# Altium PCB Main.PcbDoc
Units mil, origin at the board's own origin, x right, y up, seen from the top; angles counter-clockwise.
Board outline 850 x 950 mil, 2 copper layers (Top Layer, Bottom Layer); 23 components, 14 nets, 83 pads, 17 vias.
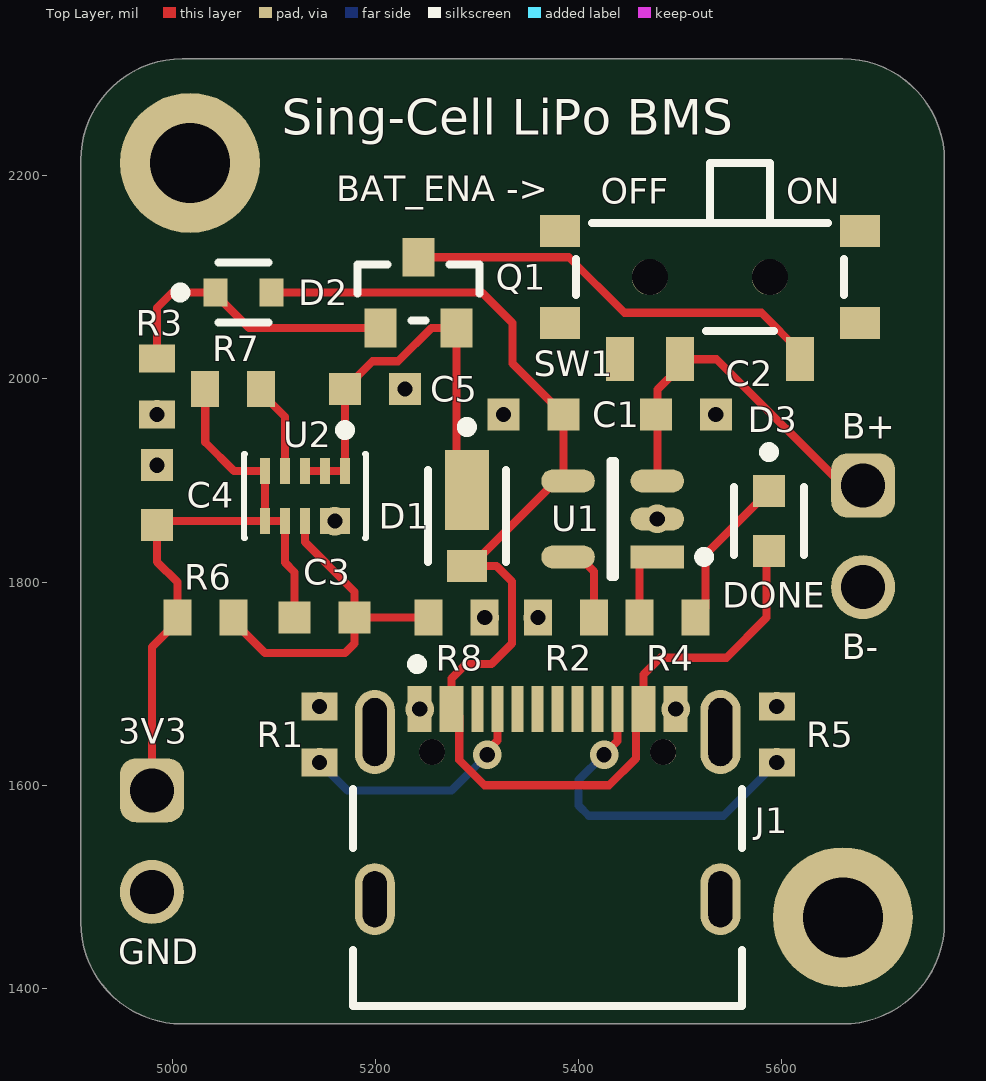
[diagram p0: Top Layer view]
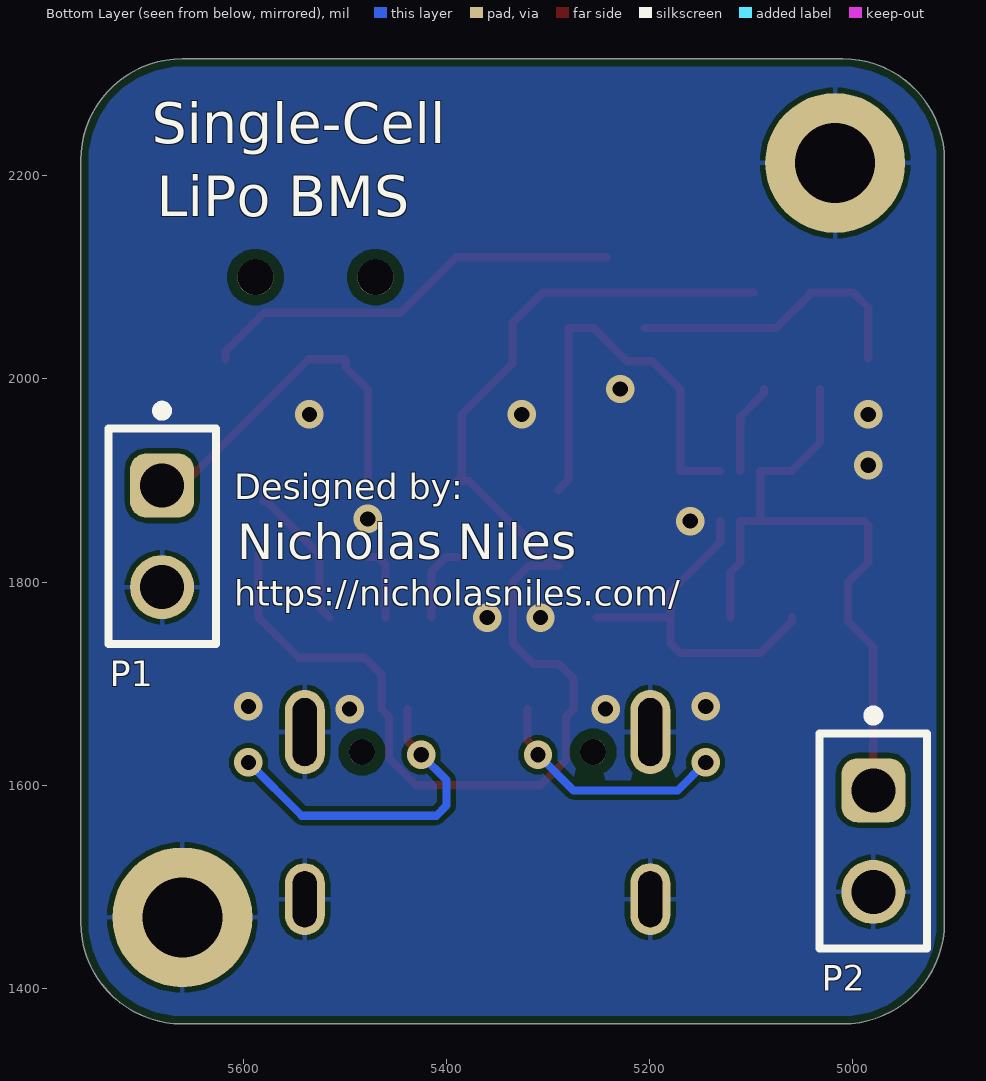
[diagram p1: Bottom Layer view, seen from below]
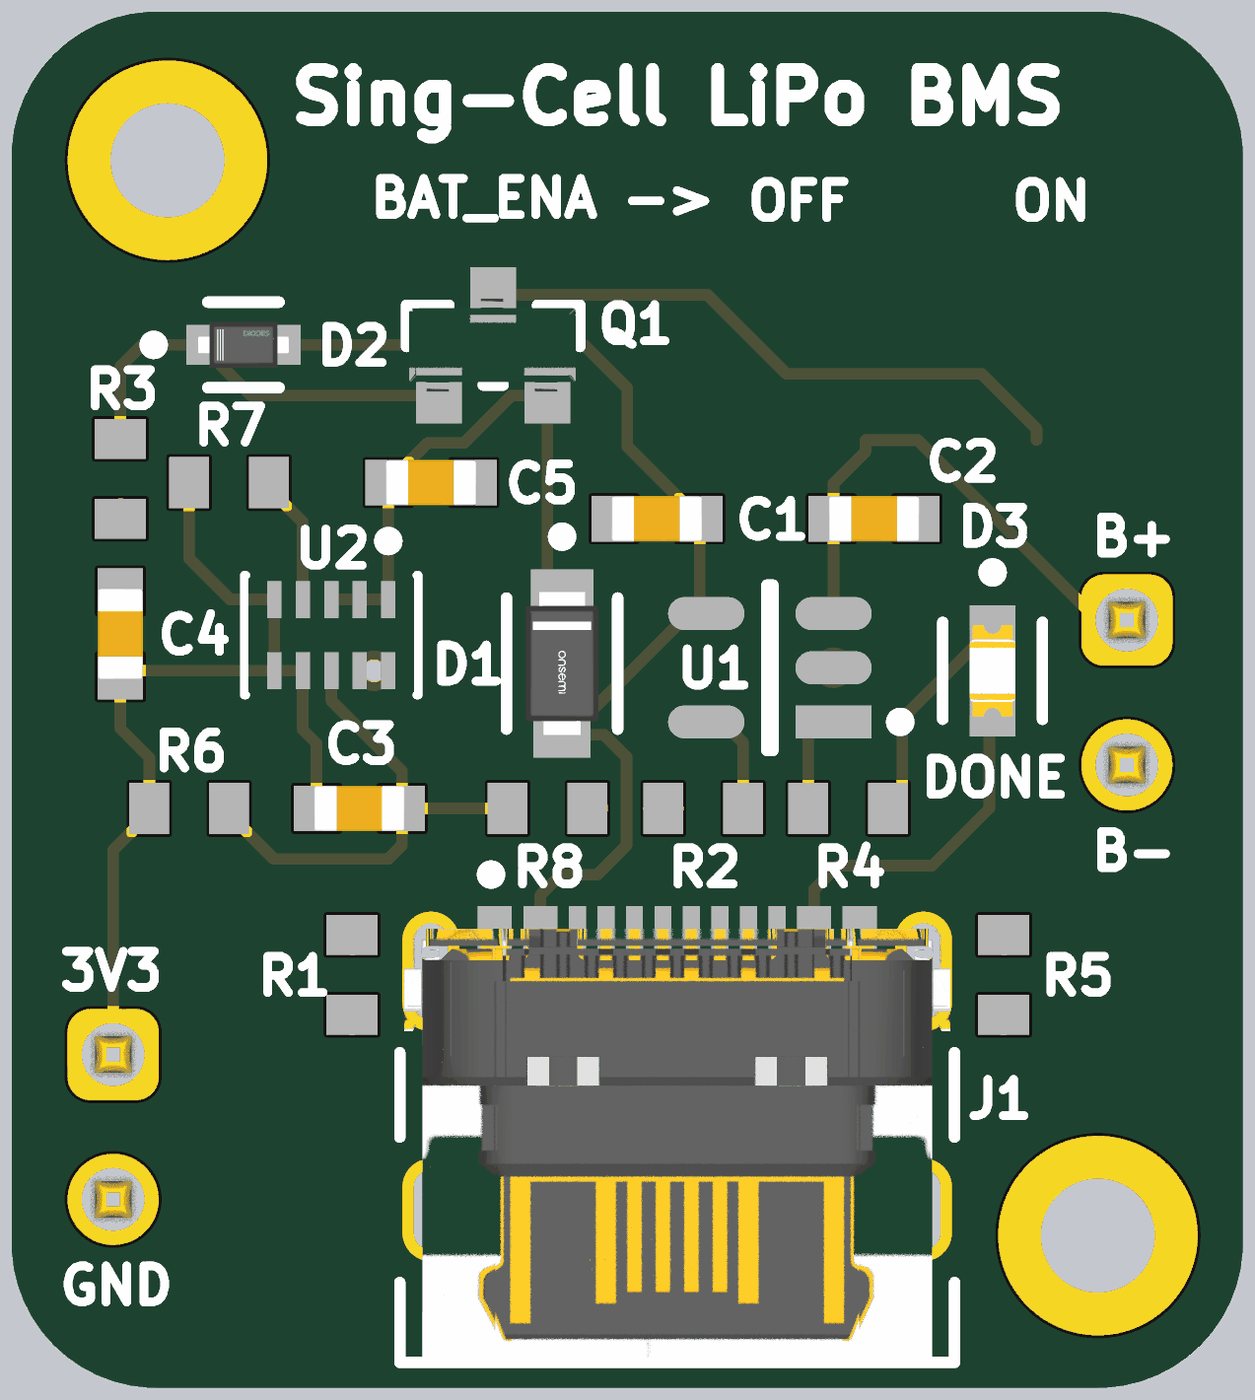
[diagram p2: 3D render of the assembled board from above, using the file's embedded part models]

## Layer stack, top to bottom
Top Solder: solder mask 0.4, Solder Resist, Dk 3.5
Top Layer: signal copper 1.4
Dielectric 1: dielectric 12.6, FR-4, Dk 4.8
Bottom Layer: signal copper 1.4
Bottom Solder: solder mask 0.4, Solder Resist, Dk 3.5

## Board outline
4910,1465 4910,2215 cw(c5010,2215) 5010,2315 5660,2315 cw(c5660,2215) 5760,2215 5760,1465 cw(c5660,1465) 5660,1365 5010,1365 cw(c5010,1465)

## Design rules (kind name [scope] priority, off if disabled: settings)
BoardOutlineClearance [All] p1: gap=7.87 ignorepadtopadclearanceinfootprint=FALSE
Clearance [All] p1: gap=5 ignorepadtopadclearanceinfootprint=TRUE except(10: Arc-Hole Track-Hole SMDPad-Hole THPad-Hole Via-Hole Fill-Hole Poly-Hole Region-Hole Text-Hole)
ComponentClearance [All] p1: gap=5 collisioncheckmode=3 verticalgap=5 showdistances=TRUE
DiffPairsRouting [All] p1: maxlimit=10 minlimit=5 mostfreqgap=5 toplayer_minwidth=5 toplayer_maxwidth=1000 toplayer_prefwidth=5 bottomlayer_minwidth=5 bottomlayer_maxwidth=1000 bottomlayer_prefwidth=5 maxuncoupledlength=500
Height [All] p1: minheight=0 maxheight=71497.94 prefheight=500
HoleSize [All] p1: absolutevalues=TRUE maxlimit=248.03 minlimit=11.81 maxpercent=80.000 minpercent=20.000
HoleToHoleClearance [All] p1: gap=10 allowstackedmicrovias=FALSE
MinimumAnnularRing [All] p1: minimumring=6
MinimumSolderMaskSliver [All] p1: minsoldermaskwidth=6
PlaneClearance [All] p1: clearance=5
PlaneConnect PlaneConnectPowerPads [InPadClass('PowerPads')] p1: planeconnectstyle=Direct reliefexpansion=20 reliefentries=4 reliefconductorwidth=10 reliefairgap=10
PlaneConnect [All] p2: pad.planeconnectstyle=Relief pad.reliefexpansion=11.81 pad.reliefentries=4 pad.reliefconductorwidth=5 pad.reliefairgap=5 via.planeconnectstyle=Direct via.reliefexpansion=11.81 via.reliefentries=4 via.reliefconductorwidth=5 via.reliefairgap=5
PolygonConnect PolygonConnectPowerPads [All vs (InPadClass('PowerPads'))] p1: connectstyle=Direct reliefconductorwidth=10 reliefentries=4 polygonreliefangle="90 Angle" airgapwidth=10
PolygonConnect [All] p2: thpad.connectstyle=Relief thpad.reliefconductorwidth=5 thpad.reliefentries=4 thpad.polygonreliefangle="90 Angle" thpad.airgapwidth=5 smdpad.connectstyle=Relief smdpad.reliefconductorwidth=5 smdpad.reliefentries=4 smdpad.polygonreliefangle="90 Angle" smdpad.airgapwidth=5 via.connectstyle=Direct via.reliefconductorwidth=5 via.reliefentries=4 via.polygonreliefangle="90 Angle" via.airgapwidth=5
RoutingVias [All] p1: holewidth=11.81 width=23.62 viastyle="Through Hole" minholewidth=11.81 minwidth=23.62 maxholewidth=23.62 maxwidth=259.84
SilkToSilkClearance [All] p1: silktosilkclearance=5
SilkToSolderMaskClearance [IsPad] p1: minsilkscreentomaskgap=5 clearancetoexposedcopper=TRUE
SolderMaskExpansion [All] p1: expansion=2 istentingtop=FALSE
SupplyNets "Schematic Supply Nets_5" [InNet('VBAT')] p1: voltage=0.000
SupplyNets "Schematic Supply Nets_4" [InNet('3V3')] p2: voltage=0.000
SupplyNets "Schematic Supply Nets_3" [InNet('USB_VCC')] p3: voltage=0.000
SupplyNets "Schematic Supply Nets_2" [InNet('GND')] p4: voltage=0.000
SupplyNets "Schematic Supply Nets_1" [InNet('BUCK_IN')] p5: voltage=0.000
UnRoutedNet [All] p1: checkbadconnections=TRUE
Width Width_10mil [All] p1: maxlimit=1000 minlimit=8 preferedwidth=8 minimp=50.000000 maximp=50.000000 favimp=50.000000
Width Width_6mil [All] p2: maxlimit=1000 minlimit=6 preferedwidth=6 minimp=50.000000 maximp=50.000000 favimp=50.000000
Width Power_20mil [All] p3: maxlimit=1000 minlimit=20 preferedwidth=20 minimp=50.000000 maximp=50.000000 favimp=50.000000
Width Power_12mil [All] p4: maxlimit=1000 minlimit=12 preferedwidth=12 minimp=50.000000 maximp=50.000000 favimp=50.000000
Width Width_5mil [All] p5: maxlimit=1000 minlimit=5 preferedwidth=5 minimp=50.000000 maximp=50.000000 favimp=50.000000
19 further rules are at their usual default settings.

## Components (designator, comment, footprint, x,y, rotation, side; value= is the part's Value field where it differs from the comment)
C1 "4.7µF" WCAP-CSGP_0603_L1.6W0.8H0.8_Reflow 5355.47,1965 r0 top
C2 "4.7µF" WCAP-CSGP_0603_L1.6W0.8H0.8_Reflow 5505.47,1965 r180 top
C3 "120pF" WCAP-CSGP_0603_L1.6W0.8H0.8_Reflow 5150,1765 r180 top
C4 "10µF" WCAP-CSGP_0603_L1.6W0.8H0.8_Reflow 4985,1885.47 r270 top
C5 "10µF" WCAP-CSGP_0603_L1.6W0.8H0.8_Reflow 5199.53,1990 r180 top
D1 "NRVBSS14HE" FP-477AD-MFG 5290,1865 r270 top
D2 "1N4148WT-7" FP-SOD523-MFG 5070,2085 r0 top
D3 "LTST-C190KGKT" FP-LTST-C190KGKT-MFG 5587.28,1860 r270 top
J1 "USB4105-GF-A" FP-USB4105-GF-A-MFG 5369.49,1533.66 r0 top
P1 "61300211121" 61300211121 5680,1845 r270 bottom
P2 "61300211121" 61300211121 4980,1545 r270 bottom
Q1 "IRLML6402TRPBF" FP-Micro3-MFG 5242.4,2084.84 r90 top
R1 "5.1kΩ" RESC1608X55X25NL10T15 5145,1650 r270 top
R2 "10kΩ" RESC1608X55X25NL10T15 5387.44,1765 r180 top
R3 "10kΩ" RESC1608X55X25NL10T15 4985,1992.56 r270 top
R4 "1kΩ" RESC1608X55X25NL10T15 5487.56,1765 r180 top
R5 "5.1kΩ" RESC1608X55X25NL10T15 5595,1650 r270 top
R6 "453kΩ" RESC1608X55X25NL10T15 5032.56,1765 r0 top
R7 "100kΩ" RESC1608X55X25NL10T15 5060,1990 r180 top
R8 "100kΩ" RESC1608X55X25NL10T15 5280,1765 r0 top
SW1 "450404015514" 450404015514 55529.06,52100 r0 top
U1 "MCP73831T-2ACI/OT" FP-C04-091-OT-IPC_B 5433.5,1862.09 r180 top
U2 "TPSM82823SILR" SIL0010D-MFG 5130.63,1884.61 r270 top

## Footprints (in the part's own frame and the unit in brackets; to place one, negate y for a bottom-side part, rotate by r counter-clockwise, add the part's x,y. Pads: shape width x height; smd on the part's side, far side on the other; paste and mask are expansions set on the pad)
61300211121 [mm] "Pin Header, pitch 2.54 mm, THT, Vertical, single row, 2p"
  rrect50% 1.6x1.6 hole 1.1: 1(-1.27,0)
  round 1.6 hole 1.1: 2(1.27,0)
  silkscreen extent -3.26,-1.35 2.69,1.35, body extent -2.54,-1.27 2.54,1.27, height 8.57
450404015514 [mm] "Right angle Slide Switch"
  rect 0.7x1.1 smd: COM(-1270.75,-1272.05) L1(-1267.75,-1272.05) L2(-1272.25,-1272.05)
  round 0.9 hole 0.9 unplated: M1(-1271.5,-1270) M2(-1268.5,-1270)
  rect 1x0.8 smd: M3(-1273.75,-1268.85) M4(-1266.25,-1268.85) M5(-1273.75,-1271.15) M6(-1266.25,-1271.15)
  silkscreen extent -1273.35,-1271.35 -1266.65,-1267.15, body extent -1273.85,-1272.25 -1266.15,-1267.12, height 1.4
FP-477AD-MFG [mm]
  rect 2x1.1 smd paste+0 mask+0: 1(-0.65,0)
  rect 0.8x1 smd paste+0 mask+0: 2(1.25,0)
  silkscreen extent -2.35,-0.97 1.15,0.97, body extent -1.75,-0.8 1.75,0.8, height 0.25
FP-C04-091-OT-IPC_B [mm]
  rect 1.338x0.578 smd paste+0 mask+0: 1(-1.116,0.95)
  rrect100% 1.338x0.578 smd paste+0 mask+0: 2(-1.116,0) 3(-1.116,-0.95) 4(1.116,-0.95) 5(1.116,0.95)
  silkscreen extent -2.41,-1.45 0.05,1.45
FP-LTST-C190KGKT-MFG [mm]
  rect 0.8x0.8 smd paste+0 mask+0: 1(-0.75,0) 2(0.75,0)
  silkscreen extent -1.85,-0.87 0.85,0.87, body extent -1.25,-0.55 1.25,0.55, height 0.25
FP-Micro3-MFG [mm]
  rect 0.972x0.802 smd paste+0 mask+0: 1(-0.885,0.95) 2(-0.885,-0.95) 3(0.885,0)
  silkscreen extent -0.7,-1.52 0.7,1.52, body extent -1.47,-1.87 1.47,1.87, height 0.25
FP-SOD523-MFG [mm]
  rect 0.6x0.7 smd paste+0 mask+0: 1(-0.7,0) 2(0.7,0)
  silkscreen extent -1.7,-0.75 0.63,0.75, body extent -1.1,-0.53 1.1,0.53, height 0.25
FP-USB4105-GF-A-MFG [mm]
  rrect100% 1x2.1 hole 1.7 slot 0.6 at 0 deg paste-2539.97 mask+0: 1(-4.32,3.015) 2(4.32,3.015)
  rrect100% 1x1.8 hole 1.4 slot 0.6 at 0 deg paste-2539.97 mask+0: 3(-4.32,-1.165) 4(4.32,-1.165)
  rect 0.6x1.15 smd paste+0 mask+0: A1-B12(-3.2,3.59) A4-B9(-2.4,3.59) B1-A12(3.2,3.59) B4-A9(2.4,3.59)
  rect 0.3x1.15 smd paste+0 mask+0: A5(-1.25,3.59) A6(-0.25,3.59) A7(0.25,3.59) A8(1.25,3.59) B5(1.75,3.59) B6(0.75,3.59) B7(-0.75,3.59) B8(-1.75,3.59)
  round 0.65 hole 0.65 unplated paste-2539.97 mask+0: ""(-2.89,2.515) ""(2.89,2.515)
  silkscreen extent -4.86,-3.84 4.86,4.84, body extent -4.96,-3.94 4.96,4.27, height 0.25
RESC1608X55X25NL10T15 [mm] "Chip Resistor, 2-Leads, Body 1.60x0.80mm, IPC Medium Density"
  rect 0.7x0.9 smd: 1(-0.7,0) 2(0.7,0)
  body extent -0.85,-0.45 0.85,0.45, height 0.55
SIL0010D-MFG [mm]
  rect 0.65x0.25 smd paste+0 mask+0: 1(-0.625,1) 2(-0.625,0.5) 3(-0.625,0) 4(-0.625,-0.5) 5(-0.625,-1) 6(0.625,-1) 7(0.625,-0.5) 8(0.625,0) 9(0.625,0.5) 10(0.625,1)
  silkscreen extent -1.77,-1.53 1.05,1.53
WCAP-CSGP_0603_L1.6W0.8H0.8_Reflow [mm] "Ceramic Capacitors, body 1.6x0.8mm"
  rect 0.8x0.8 smd: 1(-0.75,0) 2(0.75,0)
  body extent -0.8,-0.4 0.8,0.4, height 0.8

## Part data
C1 C2 C3 C5: library part CMP-207839-000060-3
C4: library part CMP-207839-000060-3, "10V tolerance"
D1: library part CMP-00278-93203856-2, "NRVBSS14HE Rectifier Diode, Schottky, 1 Phase, 1 Element, 1A, 40V V(RRM), Silicon", Capacitance=55pF, Forward Current=1A, Manufacturer Lifecycle Status=ACTIVE, Max Forward Surge Current (Ifsm)=25A, Max Junction Temperature (Tj)=150°C, Max Repetitive Reverse Voltage (Vrrm)=40V, Min Operating Temperature=-55°C, Peak Reverse Current=5µA, Height=750µm, Lifecycle Status=Production, Max Operating Temperature=150°C, NexarPartId=93203856, Reverse Voltage=40V, RoHS=Compliant
D2: library part CMP-2000-05518-3, "DIODE GEN PURP 80V 125MA SOD523", Average Rectified Current=125mA, Capacitance=2pF, Forward Current=250mA, Forward Voltage=1.25V, Max Forward Surge Current (Ifsm)=2A, Max Operating Temperature=150°C, Max Repetitive Reverse Voltage (Vrrm)=100V, Max Reverse Voltage (DC)=80V, Min Operating Temperature=-65°C, Package Quantity=3000, Peak Reverse Current=1uA, Power Dissipation=150mW, Contact Plating=Tin, Current Rating=125mA, Element Configuration=Single, Height=0.65mm, Lead Free="Lead Free", Length=0.9mm, Max Surge Current=2A, Mount="Surface Mount", Number of Pins=2, Output Current=125mA, Packaging="Tape and Reel", Peak Non-Repetitive Surge Current=2A, Polarity=Standard, Power Rating=150mW, Radiation Hardening=No, REACH SVHC="No SVHC", Recovery Time=4ns, Reverse Recovery Time=4ns, Voltage Rating (DC)=80V, Weight=3.5E-05oz, Width=1.3mm
D3: library part CMP-2000-05197-2, "LED GREEN CLEAR CHIP SMD", Case Code (Imperial)=0603, Case Code (Metric)=1608, Color=Green, Forward Current=30mA, Forward Voltage=2V, Lens Color=Colorless, Max Operating Temperature=85°C, Min Operating Temperature=-55°C, Package Quantity=1, Power Dissipation=75mW, Reverse Voltage=5V, Test Current=20mA, Case/Package=0603, Depth=0.8mm, Dominant Wavelength=571nm, Height=0.8mm, Illumination Color=Green, Lead Free="Lead Free", Length=1.6mm, Lens Style=Diffused, Lens Transparency=Clear, Luminous Intensity=35mcd, Mount="Surface Mount", Number of Elements=1, Number of LEDs=1, Number of Pins=2, Packaging="Tape and Reel", Power Rating=75mW, Radiation Hardening=No, Viewing Angle=130°, Wavelength=574nm, Width=0.8mm
J1: library part CMP-245163-000001-1, "CONN RCPT USB2.0 TYPEC 5A", Current Rating=5/6.25/1.25/0.25A, Manufacturer=GCT, Package=0, Temperature="-40°C to +85°C", Temperature Range High=+85°C, Temperature Range Low=-40°C, Voltage Rating=20V, Automotive=No, Category=Conn, ComponentLink2Description=Datasheet, ComponentLink2URL=https://gct.co/files/drawings/usb4105.pdf, Conn Orientation="Right Angle", Contact Material=Gold,Nickel, Device Class L1=Connectors, Device Class L2="USB Connectors", Device Class L3=unset, Digikey Description="CONN RCPT USB2.0 TYPEC 5A", Height=3.46mm, Is Female=yes, Lead Free=Yes, Manufacturer Part Number=USB4105-GF-A, Number of Contacts=16, Octopart=https://octopart.com/usb4105-gf-a-gct-106627878, RoHS=TRUE, Usb Standard="USB 2.0"
P1 P2: library part CMP-1712-00002-6, Color=Black, Contact Resistance=20mΩ, Current Rating=3A, Max Operating Temperature=125°C, Min Operating Temperature=-40°C, Operating Supply Voltage=250V, Connector Type="Male Pin", Contact Gender=Male, Contact Material=Copper, Contact Mating Length=5.9944mm, Contact Plating=Gold, Gender=Male, Height=8.94mm, Housing Material=PBT, Lead Free="Lead Free", Lead Pitch=2.54mm, Mount="Through Hole", NexarPartId=20081794, Number of Contacts=2, Number of Pins=2, Number of Positions=2, Number of Rows=1, Orientation=Vertical, Packaging=Bulk, Pitch=2.54mm, REACH SVHC="No SVHC", RoHS=Compliant, Termination="Through Hole", Voltage Rating=250V
Q1: library part CMP-32901-000130-1, "MOSFET P-CH 20V 3.7A SOT-23", Continuous Drain Current=-3.7A, Drain To Source Breakdown Voltage=-20V, Drain To Source Resistance=0.05Ω, Gate To Source Voltage=12V, Input Capacitace At Vds="633pF @ -10V", Manufacturer=Infineon, Max Forward Diode Voltage=-1.2V, Max Junction Temp=+150°C, Package=Micro3, Power Dissipation=1.3W, Pulse Drain Current=-22A, Temperature="-55°C to +150°C", Temperature Range Low=-55°C, Automotive=No, Category=Trans, ComponentLink2Description=Datasheet, ComponentLink2URL=https://www.infineon.com/dgdl/irlml6402pbf.pdf?fileId=5546d462533600a401535668d5c2263c, Depletion Mode=False, Device Class L1="Discrete Semiconductors", Device Class L2=Transistors, Device Class L3=MOSFETs, Digikey Description="MOSFET P-CH 20V 3.7A SOT-23", Drain To Source Voltage=-20V, Footprint Url=http://irf.com/package/outline/po_micro3.pdf, Gate Charge At Vgs="8nC @ -5V", Height=1.12mm, Ipc Land Pattern Name=SOT95P237X100-3, Lead Free=Yes, Manufacturer Part Number=IRLML6402TRPBF, Number Of Channels=1, Number Of P Channels=1, Octopart=https://octopart.com/irlml6402trpbf-infineon-65874989, Reverse Recovery Charge=11nC, Reverse Recovery Time=29ns, RoHS=TRUE, Rthja Max=75°C/W, Standoff Height=0.01mm, Technology=MOSFET, Temperature Range High=+150°C, Threshold Vgs=-0.55V, Threshold Vgs Max=-1.2V, Threshold Vgs Min=-0.4V, Turn Off Delay Time=588ns, Turn On Delay Time=350ns
R1 R2 R3 R4 R5 R6 R7 R8: library part CMP-2000-04186-1
SW1: library part CMP-03913-99472344-1, "450404015514 Slide Switch, 0.3A, 5Vdc, Smd Rohs Compliant: Yes", Current Rating=300mA, Insulation Resistance=100MΩ, Max Operating Temperature=85°C, Min Operating Temperature=-40°C, Voltage Rating=5V, Contact Plating=Silver, NexarPartId=99472344, Packaging="Tape and Reel", RoHS=Compliant
U1: library part CMP-0133-00143-2, "IC CONTROLLR LI-ION 4.2V SOT23-5", Case/Package=SOT-23, Drain To Source Resistance=350mR, Max Charge Current=500mA, Max Input Voltage=6V, Max Operating Temperature=85°C, Max Output Voltage=4.5V, Max Power Dissipation=1.54W, Min Operating Temperature=-40°C, Min Output Voltage=4.168V, Min Supply Voltage=3.75V, Output Voltage=4.2V, Voltage Rating=4.534V, Contact Plating=Tin, Height=0.051inch, Lead Free="Lead Free", Length=0.122inch, Max Supply Voltage=6V, Mount="Surface Mount", Number of Cells=1, Number Of Channels=1, Number of Outputs=1, Number of Pins=5, Output Current=500mA, Packaging="Tape and Reel", Radiation Hardening=No, REACH SVHC="No SVHC", Termination=SMD/SMT, Weight=0.00709oz, Width=0.071inch
U2: "No Description Available", Mfr_Name="Texas Instruments", RefDes=RefDes, Type=TYPE

## Free pads (board coordinates)
  round 137.79 hole 78.74: 7(5017.5,2212.5) 7(5660,1470)

## Via types
v1: diameter 28, hole 15, Top Layer to Bottom Layer, tented both sides, 17 vias

## Nets (pads, with @x,y where several pads share a name; then routed paths per layer and width w, separated by ;. In a path a pad name is that pad's centre, name@x,y a point inside that pad or via, vN(x,y) a via of type N, cw(c..) or ccw(c..) an arc to the next point about the centre after c; other vN are vias at no path point)
3V3: C3.2 C4.2 P2.1 R6.1 R7.2 U2.5 U2.6 U2.7 | length 678.4
  Top Layer w8: P2.1 4980,1736.06 5005,1761.06 5005,1799.91 4985,1819.91 C4.2 4989.06,1860 U2.6 ; R7.2 5032.44,1937.56 5060.79,1909.21 U2.5 U2.6 ; C3.2 5120.47,1809.67 5110.94,1819.2 U2.7 U2.6
BUCK_IN: C5.2 D1.1 Q1.2 U2.1 U2.2 U2.3 | length 418.4
  Top Layer w8: U2.3 U2.2 U2.1 C5.2 5197.28,2017.28 5222.28,2017.28 5255,2050 Q1.2 5279.8,1900.79 D1.1
GND: C1.1 C2.1 C4.1 C5.1 J1.1 J1.2 J1.3 J1.4 J1.A1-B12 J1.B1-A12 P1.2 P2.2 pad.7 R1.1 R2.2 R3.2 R5.1 R8.2 U1.2 U2.9 U2.10 | length 19.7
  Top Layer w8: U2.9 U2.10
  other v1: 5243.5,1675 5495.47,1675 5145,1677.56 5595,1677.56 5307.56,1765 5359.88,1765 5160.16,1860 5477.45,1862.09 4985,1915 4985,1965 5325.94,1965 5535,1965 5229.06,1990
NetC3_1: C3.1 R6.2 R8.1 U2.8 | length 353.8
  Top Layer w8: R6.2 5060.12,1761.06 5091.18,1730 5170,1730 5179.53,1739.53 C3.1 ; U2.8 5130.63,1839.37 5179.53,1790.47 C3.1 ; R8.1 C3.1
NetD2_1: D2.1 Q1.1 R3.1 | length 289.8
  Top Layer w8: R3.1 4985,2070 5000,2085 D2.1 ; D2.1@5042.44,2083.03 5075.47,2050 Q1.1
NetD3_1: D3.1 R4.1 | length 143.8
  Top Layer w8: R4.1 5524.9,1774.78 5524.9,1827.14 5575.54,1877.78 5577.76,1880 D3.1@5580.66,1880
NetJ1_A5: J1.A5 R1.2 | length 240.1
  Top Layer w8: v1(5310,1630) 5310,1633.65 5320.28,1643.92 J1.A5
  Bottom Layer w8: v1(5145,1622.44) 5172.44,1595 5275,1595 v1(5310,1630)
NetJ1_B5: J1.B5 R5.2 | length 334.1
  Top Layer w8: v1(5425,1630) 5438.39,1643.39 J1.B5 ; R5.2@5593.36,1624.08 v1(5595,1622.44)
  Bottom Layer w8: v1(5425,1630) 5400,1605 5400,1580 5410,1570 5542.56,1570 v1(5595,1622.44)
NetQ1_3: Q1.3 SW1.L1 | length 421.4
  Top Layer w8: Q1.3 5390.31,2119.68 5445,2065 5579.8,2065 5617.64,2027.17 SW1.L1
NetR7_1: R7.1 U2.4 | length 90.5
  Top Layer w8: R7.1 5087.56,1986.06 5110.94,1962.68 U2.4
PROG: R2.1 U1.5 | length 76.7
  Top Layer w8: U1.5 5400.53,1824.68 5415,1810.22 R2.1
STAT: R4.2 U1.1 | length 72.8
  Top Layer w8: R4.2 5460,1817.31 5467.38,1824.68 U1.1
USB_VCC: C1.2 D1.2 D2.2 D3.2 J1.A4-B9 J1.B4-A9 U1.4 | length 1308
  Top Layer w8: D2.2 5305,2085 5335,2055 5335,2015 C1.2 5385,1904.05 U1.4 5377.64,1899.49 D1.2@5293.94,1815.79 ; D1.2 D1.2@5293.94,1815.79 ; J1.B4-A9@5459.95,1670.98 5456.47,1667.5 5456.47,1626.47 5430,1600 5307.47,1600 5282.5,1624.97 5282.5,1667.5 J1.A4-B9 5275,1705 5289.25,1719.25 5314.25,1719.25 5334.53,1739.53 5334.53,1800.47 5319.21,1815.79 D1.2@5293.94,1815.79 ; J1.B4-A9 5463.98,1708.98 5480.44,1725.44 5545.44,1725.44 5585,1765 D3.2@5585,1826.54
VBAT: C2.2 P1.1 SW1.COM U1.3 | length 355
  Top Layer w8: U1.3 5477.45,1989.34 5499.53,2011.42 SW1.COM 5535.71,2019.29 P1.1@5670,1885
pads on no net: J1. J1.A6 J1.A7 J1.A8 J1.B6 J1.B7 J1.B8 SW1.L2 SW1.M1 SW1.M2 SW1.M3 SW1.M4 SW1.M5 SW1.M6

## Polygon pours and split planes (outlines as drawn)
GND on Bottom Layer "GND_L02_P000" (solid, pour order 0): 5760,2315 4910,2315 4910,1365 5760,1365

## Silkscreen, mask and mechanical layers (free items; w line width, h text height)
Top Overlay:
  text "Sing-Cell LiPo BMS" at 5107.6,2240.01 h35
  text "BAT_ENA ->" at 5161.29,2174.59 h25
  text "OFF" at 5421.68,2172.5 h25
  text "ON" at 5604.17,2172.5 h25
  text "B+" at 5659.17,1941 h25
  text "DONE" at 5541.47,1774.52 h25
  text "B-" at 5659.17,1724.01 h25
  text "3V3" at 4946.68,1641 h25
  text "GND" at 4946.68,1424.01 h25
Bottom Overlay:
  text "Single-Cell" at 5690,2231.67 h40
  text "LiPo BMS" at 5685,2160.01 h40
  text "Designed by:" at 5609,1881.67 h25
  text "Nicholas Niles" at 5606,1822.51 h35
  text "https://nicholasniles.com/" at 5609.07,1776.67 h25
Mechanical 1:
  the board outline again, w10